# EAGLE board Audio Amplifier Board (EAGLE 9.1.3)
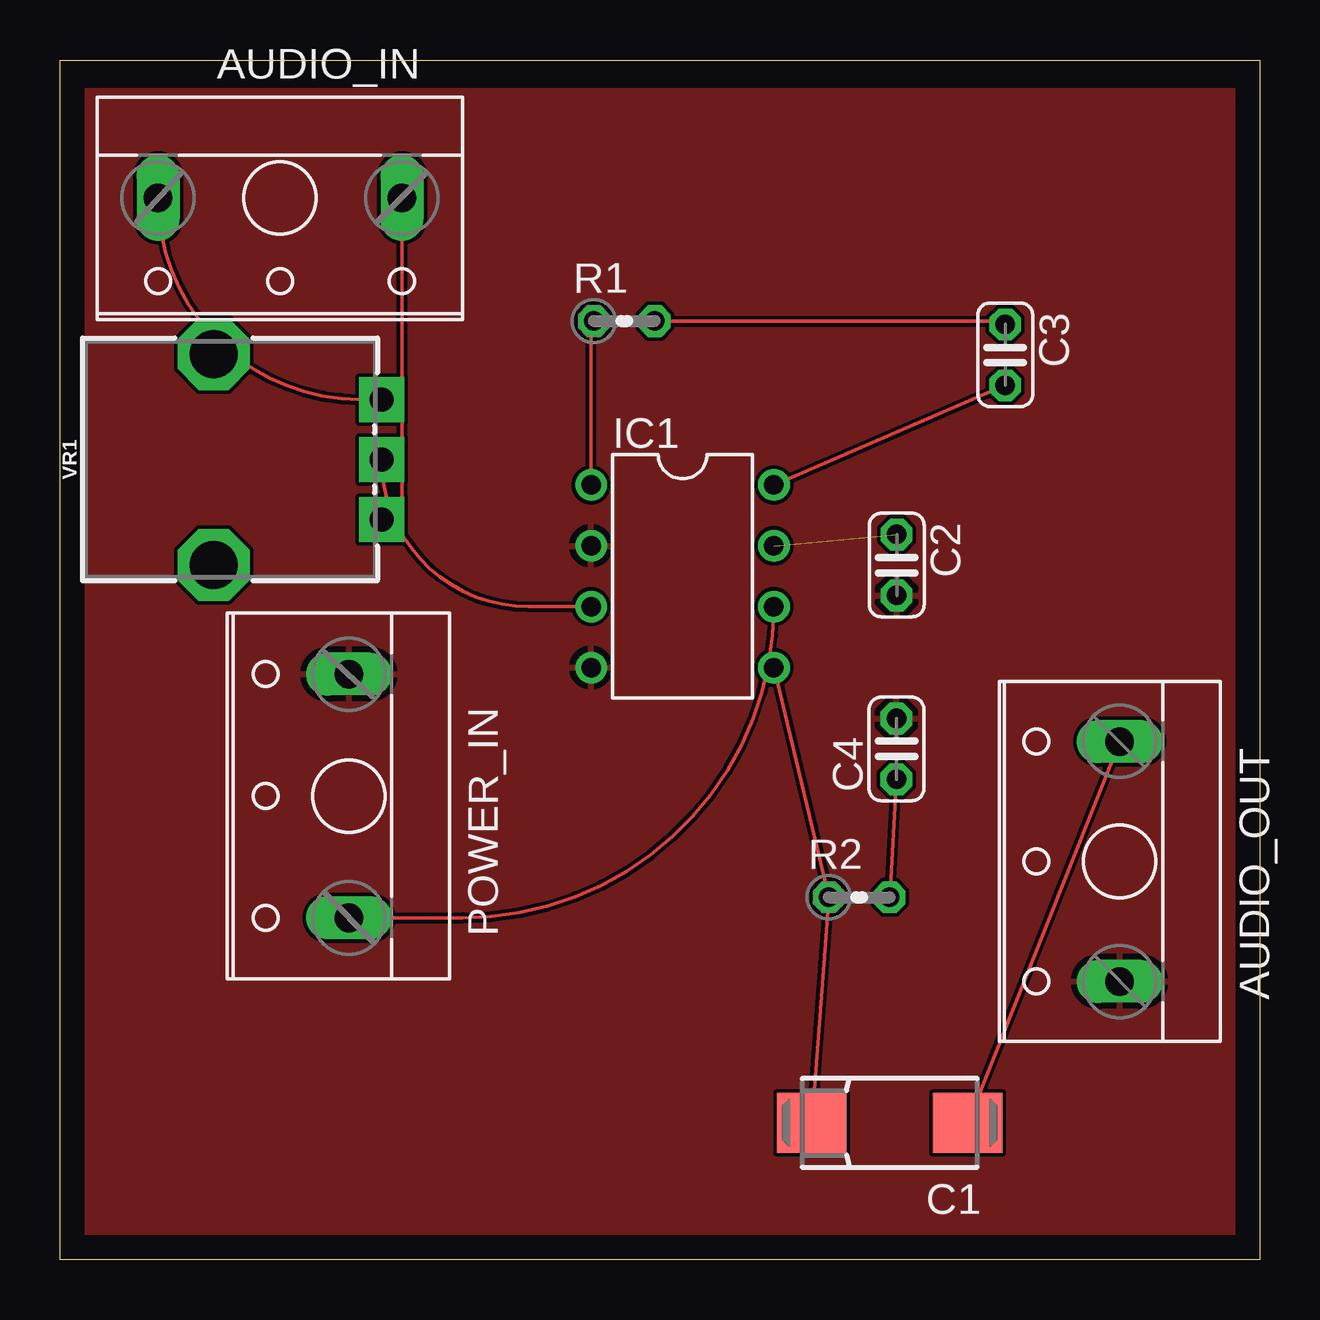
[diagram p0: board, top side]

Size 50 x 50 mm. Coordinates in mm from the lower left corner, seen from the top.
Outline: 0,50 50,50 50,0 0,0 0,50
Copper layers (1*16): Top 0.035mm / dielectric 1.5mm / Bottom 0.035mm
Design rules "default": minimum track width 6mil, minimum drill 0.35mm, track to track 6mil, track to pad 6mil, pad to pad 6mil, via to via 6mil, smd to smd 6mil, copper to edge 40mil, drill to drill 6mil, minimum pad ring 10mil, minimum via ring 8mil, stop-mask expansion 4mil, vias tented up to drill 0mil, thermal gap 10mil

## Footprints (pad centres in the part's own frame; a part is rotated, then mirrored left to right if it is on the bottom)
W237-2N = drill 1.194 long: 1 -5.08,-0.635; 2 5.08,-0.635
W237-113 = drill 1.194 long: 1 -5,-1.27; 2 5,-1.27
085CS_1AR = smd 2.9 x 2.5: + 3.25,0; - -3.25,0
C025-024X044 = drill 0.813 octagon: 1 -1.27,0; 2 1.27,0
DIL08 = drill 0.813 pad 1.27: 1 -3.81,-3.81; 2 -1.27,-3.81; 3 1.27,-3.81; 4 3.81,-3.81; 5 3.81,3.81; 6 1.27,3.81; 7 -1.27,3.81; 8 -3.81,3.81
0204V = drill 0.813 octagon: 1 -1.27,0; 2 1.27,0
POT-PTH-ALPS = drill 1 pad 1.88 square: P$1 7,-2.5; P$2 7,0; P$3 7,2.5 | drill 2 octagon: P$4 0,-4.4; P$5 0,4.4

## Placement (x,y rotation side)
AUDIO_IN  [W237-2N]  9.17,43.62 180 top
AUDIO_OUT  [W237-113]  42.9,16.59 90 top
C1  220uF  [085CS_1AR]  34.58,5.7 180 top
C2  10nF  [C025-024X044]  34.88,28.95 270 top
C3  10uF  [C025-024X044]  39.4,37.71 270 top
C4  50nF  [C025-024X044]  34.87,21.28 90 top
IC1  LM386N-1  [DIL08]  25.95,28.48 270 top
POWER_IN  [W237-2N]  11.41,19.32 90 top
R1  1.2k  [0204V]  23.52,39.12 0 top
R2  10  [0204V]  33.31,15.1 0 top
VR1  10k  [POT-PTH-ALPS]  6.41,33.35 0 top

## Library data of the parts
AUDIO_IN POWER_IN = con-wago-508; OC_FARNELL: unknown; OC_NEWARK: unknown
AUDIO_OUT = con-wago-500; OC_FARNELL: unknown; OC_NEWARK: unknown
C1-C4 = resistor
IC1 = linear
R1 R2 = rcl; SPICEPREFIX: R
VR1 = SparkFun-Resistors; PROD_ID: RES-09177; SF_SKU: COM-09288

## Nets
GND: AUDIO_OUT.1 C2.2 C4.2 IC1.2 IC1.4 POWER_IN.2
N$1: AUDIO_IN.1 VR1.P$1
N$2: AUDIO_IN.2 VR1.P$3
N$3: IC1.3 VR1.P$2
N$5: C2.1 IC1.7
N$6: C4.1 R2.2
N$8: IC1.1 R1.1
N$9: C3.1 R1.2
N$10: C3.2 IC1.8
N$11: C1.+ IC1.5 R2.1
N$12: AUDIO_OUT.2 C1.-
VCC: IC1.6 POWER_IN.1

## Tracks (layer width: path | path; a pad name or v marks a point on that pad's centre or on a via)
GND
  pour Top: 0.76,49.02 arc90 1.02,48.77 49.53,48.77 49.53,0.51 0.51,0.51 arc90 0.76,0.76
N$1
  Top 0.152: VR1.P$1 arc90 14.25,31.69 AUDIO_IN.1
N$2
  Top 0.152: AUDIO_IN.2 arc90 12.49,35.85 VR1.P$3
N$3
  Top 0.152: VR1.P$2 arc90 19.55,27.21 IC1.3
N$5  (1 unrouted)
N$6
  Top 0.152: R2.2 C4.1
N$8
  Top 0.152: IC1.1 22.14,39.01 arc-90 R1.1
N$9
  Top 0.152: R1.2 39.27,39.12 arc-90 C3.1
N$10
  Top 0.152: IC1.8 C3.2
N$11
  Top 0.152: IC1.5 R2.1 C1.+
N$12
  Top 0.152: C1.- AUDIO_OUT.2
VCC
  Top 0.152: POWER_IN.1 16.79,14.24 arc90 IC1.6